# Altium PCB DE-020224.PcbDoc (part 2 of 3)
Units mil, origin at the board's own origin, x right, y up, seen from the top; angles counter-clockwise.
Board outline 7874.02 x 3937.01 mil, 2 copper layers (Top Layer, Bottom Layer); 364 components, 290 nets, 895 pads, 45 vias.
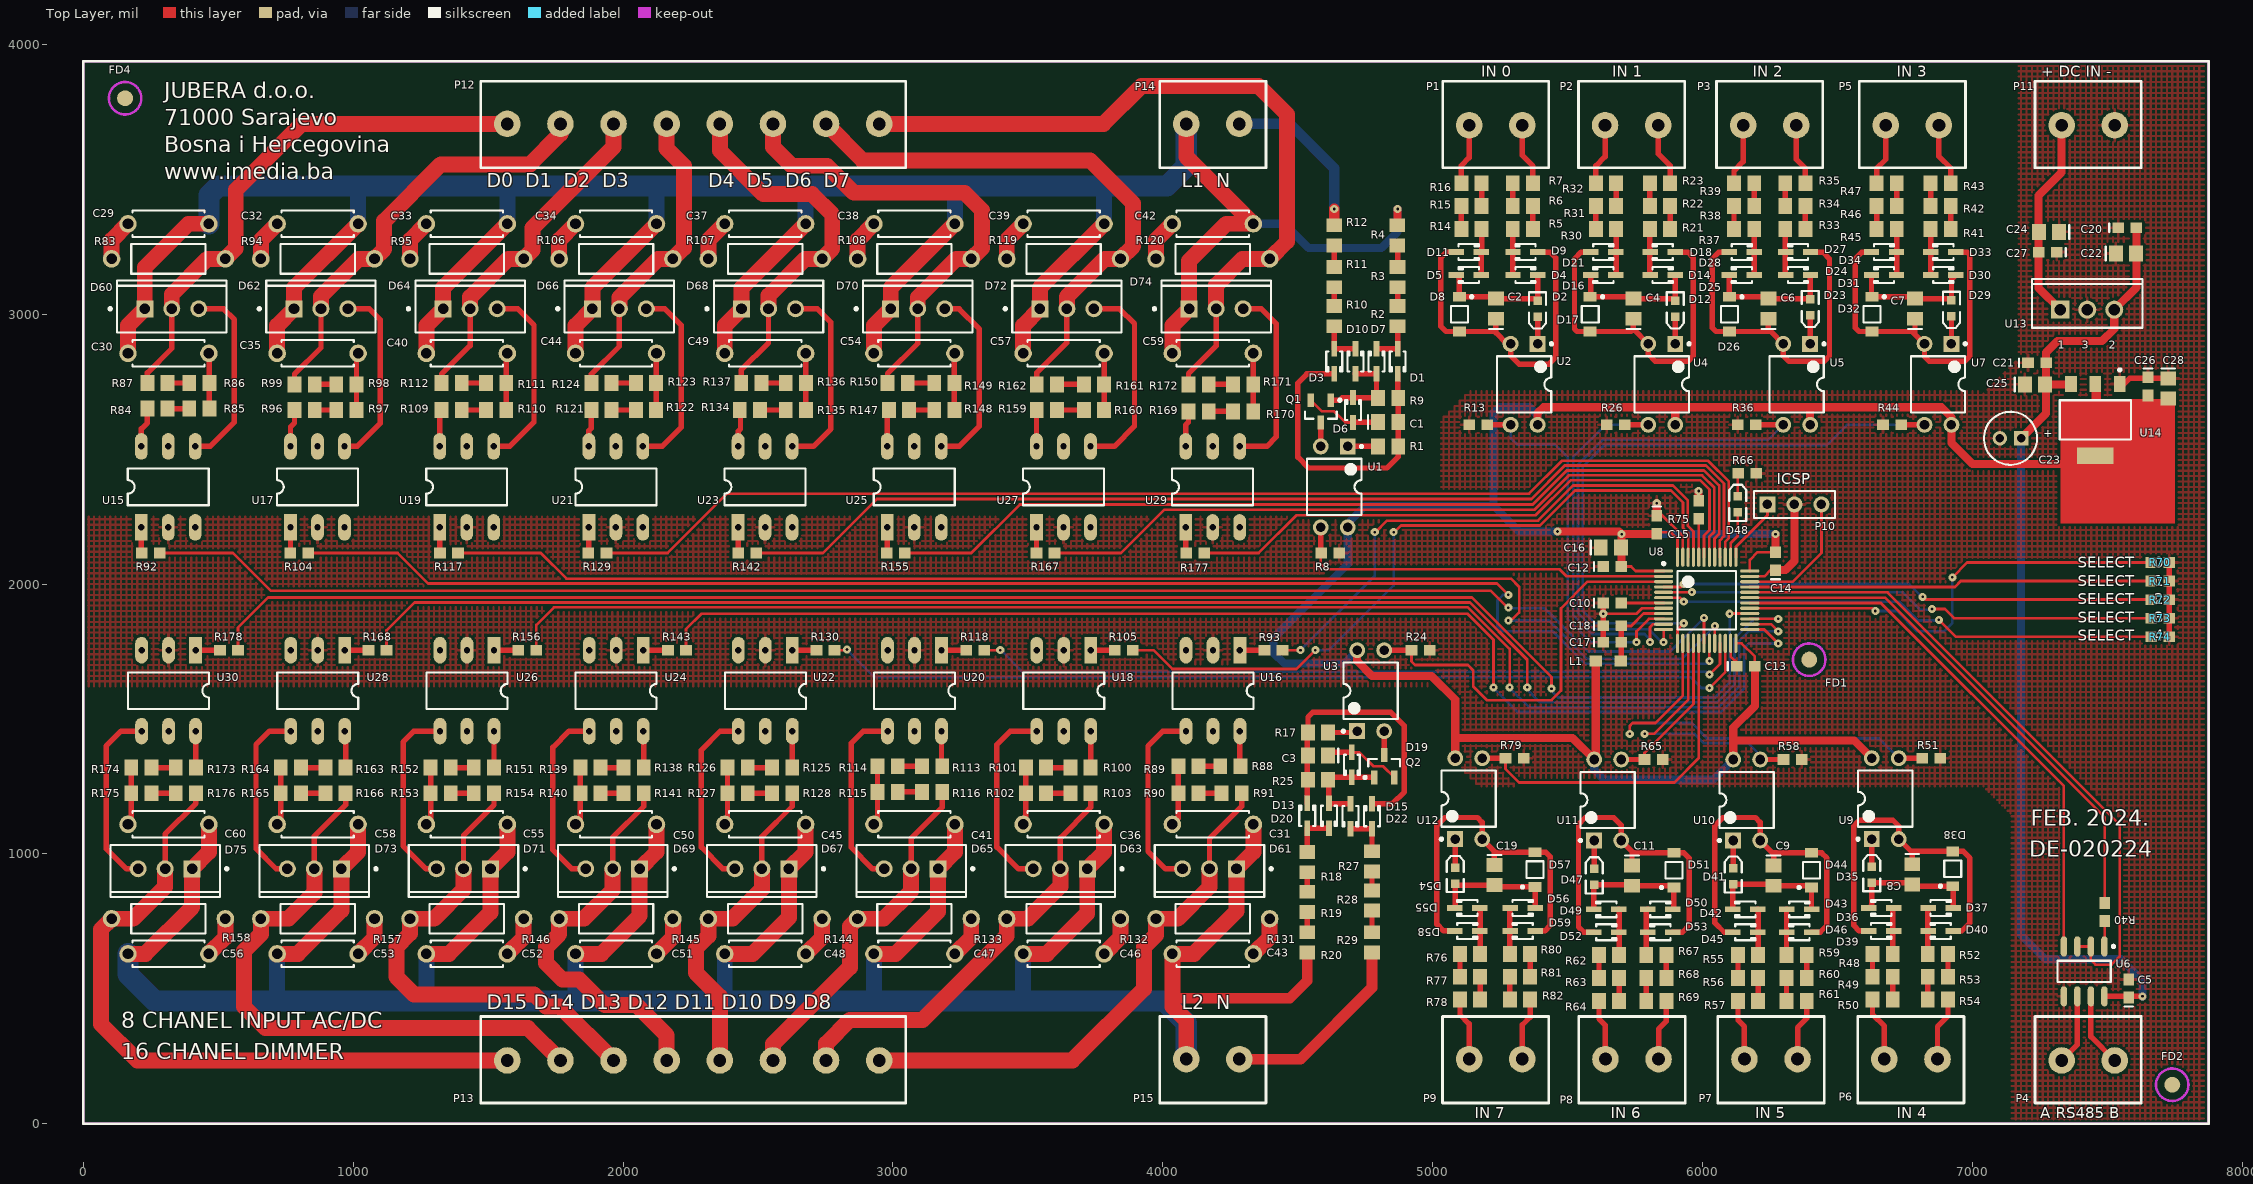
[diagram p0: Top Layer view]

## Via types
v1: diameter 30, hole 10, Top Layer to Bottom Layer, 45 vias

## Nets (pads, with @x,y where several pads share a name; then routed paths per layer and width w, separated by ;. In a path a pad name is that pad's centre, name@x,y a point inside that pad or via, vN(x,y) a via of type N, cw(c..) or ccw(c..) an arc to the next point about the centre after c; other vN are vias at no path point) (continued)
DIN3: (continued)
  Top Layer w20: R44.1@6735.31,2590 U7.3@6821.85,2590
  Bottom Layer w10: v1(5930,1855) 5600.91,1855 5556,1899.91 5556,2435.54 5635.46,2515 6460,2515 6535,2590 U7.3@6821.85,2590
DIN4: R51.1 U8.14 U9.3 | length 1637.8
  Top Layer w10: v1(5730,1445) 5730,1475 5740,1485 5825,1485 5926.42,1586.42 U8.14@5926.42,1780.55
  Top Layer w20: U9.3@6726.57,1355 R51.1@6813.11,1355
  Bottom Layer w10: v1(5730,1445) 5730,1475 5740,1485 5960,1485 6017,1428 6653.57,1428 U9.3@6726.57,1355
DIN5: R58.1 U8.15 U10.3 | length 1004.8
  Top Layer w10: v1(5785,1445) 5820,1445 5946.1,1571.1 U8.15@5946.1,1780.55
  Top Layer w20: U10.3@6213.15,1350 R58.1@6299.69,1350
  Bottom Layer w10: v1(5785,1445) 5970,1445 6005,1410 6170,1410 6213.15,1366.85 U10.3@6213.15,1350 U10.3@6195,1350